# EAGLE board m-power-v0 (EAGLE 5.07)
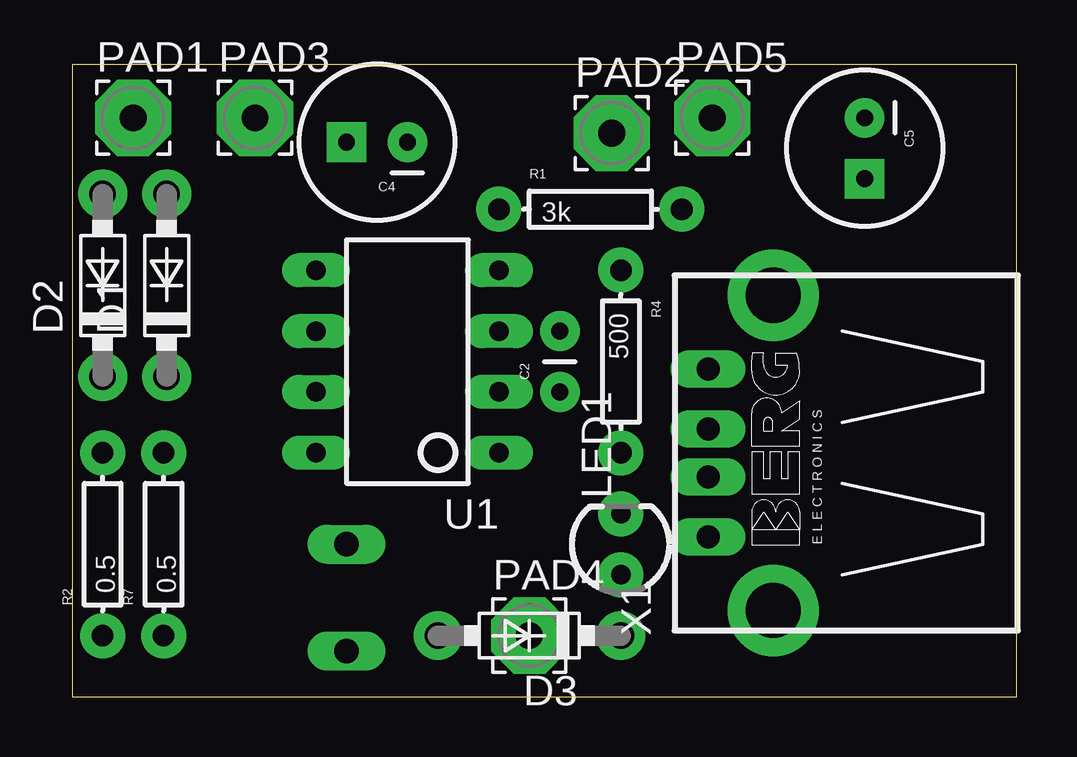
[diagram p0: board, top side]
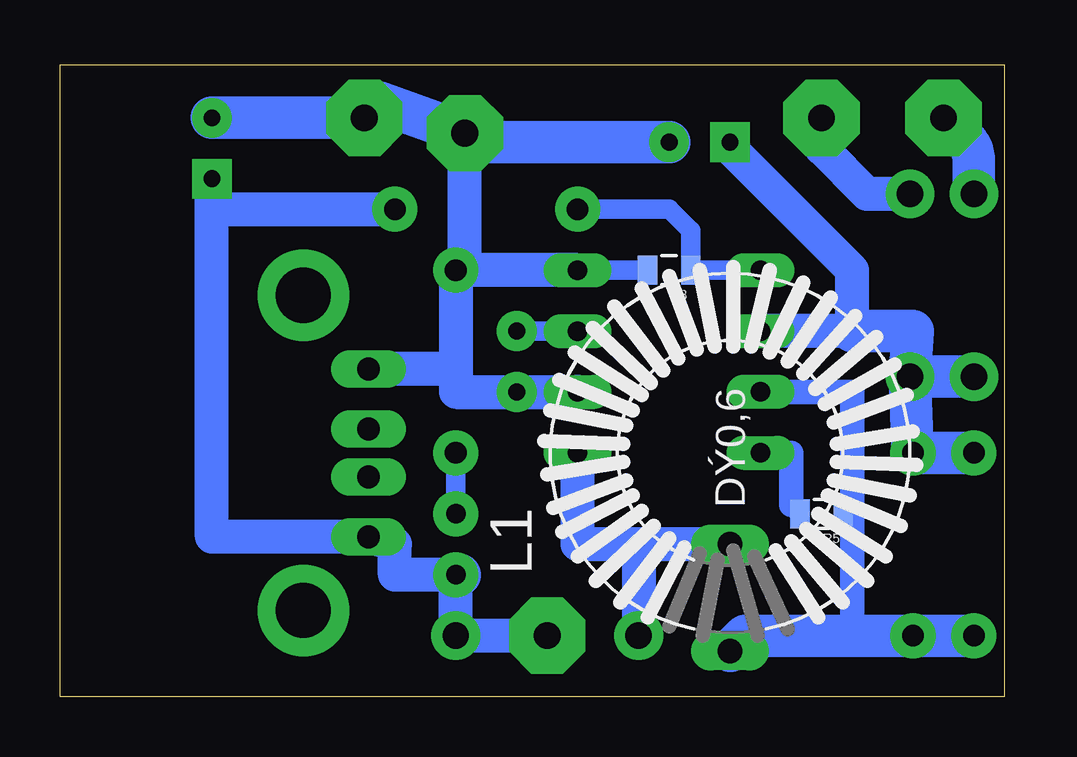
[diagram p1: board, bottom side, seen from below]

Size 39.35 x 26.34 mm. Coordinates in mm from the lower left corner, seen from the top.
Outline: 0,0 39.35,0 39.35,26.34 0,26.34 0,0
Copper layers (1*16): Top 0.035mm / dielectric 1.5mm / Bottom 0.035mm
Design rules "SparkFun-diy": minimum track width 8mil, minimum drill 20mil, track to track 10mil, track to pad 10mil, pad to pad 10mil, via to via 10mil, smd to smd 10mil, copper to edge 10mil, drill to drill 8mil, minimum pad ring 12mil, minimum via ring 10mil, stop-mask expansion 4mil, vias tented up to drill 25mil, thermal gap 10mil

## Footprints (pad centres in the part's own frame; a part is rotated, then mirrored left to right if it is on the bottom)
CAP-PTH-SMALL = drill 0.7 pad 1.651 round: 1 0,0; 2 2.54,0
CPOL-RADIAL-100UF-25V = drill 0.7 pad 1.651 square: 1 1.27,0 | drill 0.7 pad 1.651 round: 2 -1.27,0
DO41-7.6 = drill 1.1 pad 2.032 round: A 3.81,0; C -3.81,0
ED16 = drill 1.016 long: 1 -8.255,0; 2 -3.81,0
LED3MM = drill 0.813 pad 1.88 round: A -1.27,0; K 1.27,0
3,17/1,1 = drill 1.118 pad 3.175 octagon: 1 0,0
AXIAL-0.3 = drill 0.9 pad 1.88 round: P$1 -3.81,0; P$2 3.81,0
0805 = smd 0.8 x 1.2: 1 -0.9,0; 2 0.9,0
SWITCH-SPDT-AM#6 = drill 0.55 pad 1.27 offset: 1 0,2; 2 0,0; 3 0,-2 | drill 1.15 pad 2.184 square: P$1 0,-4.445; P$2 0,4.445
DIP08-L = drill 0.813 long: 1 0,-2.54; 2 2.54,-2.54; 3 5.08,-2.54; 4 7.62,-2.54; 5 7.62,5.08; 6 5.08,5.08; 7 2.54,5.08; 8 0,5.08
PN87520-S = drill 0.95 long: 1 -3.5,2.71; 2 -1,2.71; 3 1,2.71; 4 3.5,2.71 | drill 2.3 pad 3.81 round: S1 -6.57,0; S2 6.57,0

## Placement (x,y rotation side)
C2  330p  [CAP-PTH-SMALL]  20.32,12.7 90 top
C4  100uf  [CPOL-RADIAL-100UF-25V]  12.7,23.11 180 top
C5  470uf  [CPOL-RADIAL-100UF-25V]  33.02,22.86 270 top
D1  1N5819-B  [DO41-7.6]  3.94,17.14 90 top
D2  1N5819-B  [DO41-7.6]  1.27,17.14 90 top
D3  1N5819-B  [DO41-7.6]  19.05,2.54 180 top
L1  >100uH  [ED16]  11.43,10.16 90 bottom
LED1  RED  [LED3MM]  22.86,6.35 90 top
PAD1  bat1  [3,17/1,1]  2.54,24.13 0 top
PAD2  GND-IN  [3,17/1,1]  22.48,23.5 0 top
PAD3  bat2  [3,17/1,1]  7.62,24.13 0 top
PAD4  out  [3,17/1,1]  19.05,2.54 0 top
PAD5  gnd  [3,17/1,1]  26.67,24.13 0 top
R1  3k  [AXIAL-0.3]  21.59,20.32 0 top
R2  0.5  [AXIAL-0.3]  1.27,6.35 90 top
R4  500  [AXIAL-0.3]  22.86,13.97 270 top
R5  180  [0805]  7.62,7.62 180 bottom
R7  0.5  [AXIAL-0.3]  3.81,6.35 90 top
R8  1k  [0805]  13.97,17.78 180 bottom
S1  power  [SWITCH-SPDT-AM#6]  -22.35,19.05 270 top  (outside the outline)
U1  MC34063  [DIP08-L]  15.24,10.16 90 top
X1  +5V-out  [PN87520-S]  29.21,10.16 90 top

## Library data of the parts
C2 C4 C5 LED1 = SparkFun
D1-D3 L1 R1 R2 R4 R5 R7 R8 S1 U1 X1 = digital-toy
PAD1-PAD5 = wirepad

## Nets
GND: C2.1 C4.2 C5.2 PAD2.1 PAD5.1 R4.P$1 R8.2 U1.2 U1.4 X1.4
N$1: C2.2 U1.3
N$2: C4.1 D1.C D2.C R2.P$2 R7.P$2 U1.6
N$3: R1.P$1 R8.1 U1.5
N$4: C5.1 D3.C LED1.A PAD4.1 R1.P$2 X1.1
N$5: LED1.K R4.P$2
N$6: R5.2 U1.8
N$7: D2.A PAD1.1
N$8: L1.1 R2.P$1 R5.1 R7.P$1 U1.7
N$9: D1.A PAD3.1
N$10: D3.A L1.2 U1.1

## Tracks (layer width: path | path; a pad name or v marks a point on that pad's centre or on a via)
GND
  Bottom 0.813: U1.2 C2.1 | R8.2 U1.4 | 26.04,24.77 arc-90 PAD5.1 | 22.48,23.11 PAD2.1 | 22.48,17.78 R4.P$1
  Bottom 1.422: U1.4 22.48,17.78 22.48,23.11 | U1.2 22.86,12.7 22.86,13.66 | 22.86,13.66 X1.4 | R4.P$1 22.86,13.66
  Bottom 1.778: PAD2.1 26.04,24.77 | PAD5.1 C5.2 | 22.48,23.11 C4.2
N$1
  Bottom 0.813: U1.3 C2.2
N$2
  Bottom 0.813: 11.43,22.86 C4.1
  Bottom 1.422: U1.6 6.35,15.24 6.35,17.78 11.43,22.86
  Bottom 1.778: D1.C D2.C | R2.P$2 R7.P$2 D1.C | D1.C 3.81,15.24 6.35,15.24
N$3
  Bottom 0.813: U1.5 R8.1 13.07,19.42 13.97,20.32 R1.P$1
N$4
  Bottom 1.422: 33.02,20.32 R1.P$2 | 33.02,20.32 C5.1 | 33.02,20.32 33.02,6.66 X1.1 25.4,6.35 25.4,5.08 LED1.A D3.C PAD4.1
  Bottom 1.778: LED1.A 22.69,5.08
N$5
  Bottom 0.813: LED1.K R4.P$2
N$6
  Bottom 0.813: R5.2 8.89,7.99
  Bottom 1.016: 8.89,7.99 8.89,10.16 U1.8
N$7
  Bottom 1.778: D2.A 1.27,22.33 arc-45 1.64,23.23 PAD1.1
N$8
  Bottom 0.813: 6.35,7.62 R5.1
  Bottom 1.016: U1.7 6.35,12.7 6.35,7.62 6.35,2.54
  Bottom 1.778: R2.P$1 R7.P$1 6.35,2.54 10.79,2.54 L1.1
N$9
  Bottom 1.422: D1.A 5.71,20.95 7.62,22.86 PAD3.1
N$10
  Bottom 1.422: L1.2 15.24,6.35 | 15.24,6.35 17.78,6.35 U1.1 | 15.24,6.35 D3.A